# Altium PCB SGK_DVR_01.PcbDoc (part 5 of 7)
Units mil, origin at the board's own origin, x right, y up, seen from the top; angles counter-clockwise.
Board outline 3070.87 x 2598.47 mil, 6 copper layers (Top, L2 GND, l3 POWER, L4 SIG, L5 GND, Bottom), stack 58.1 mil thick; 475 components, 339 nets, 1964 pads, 1036 vias.
Unrouted connection lines stored in the file: 522.
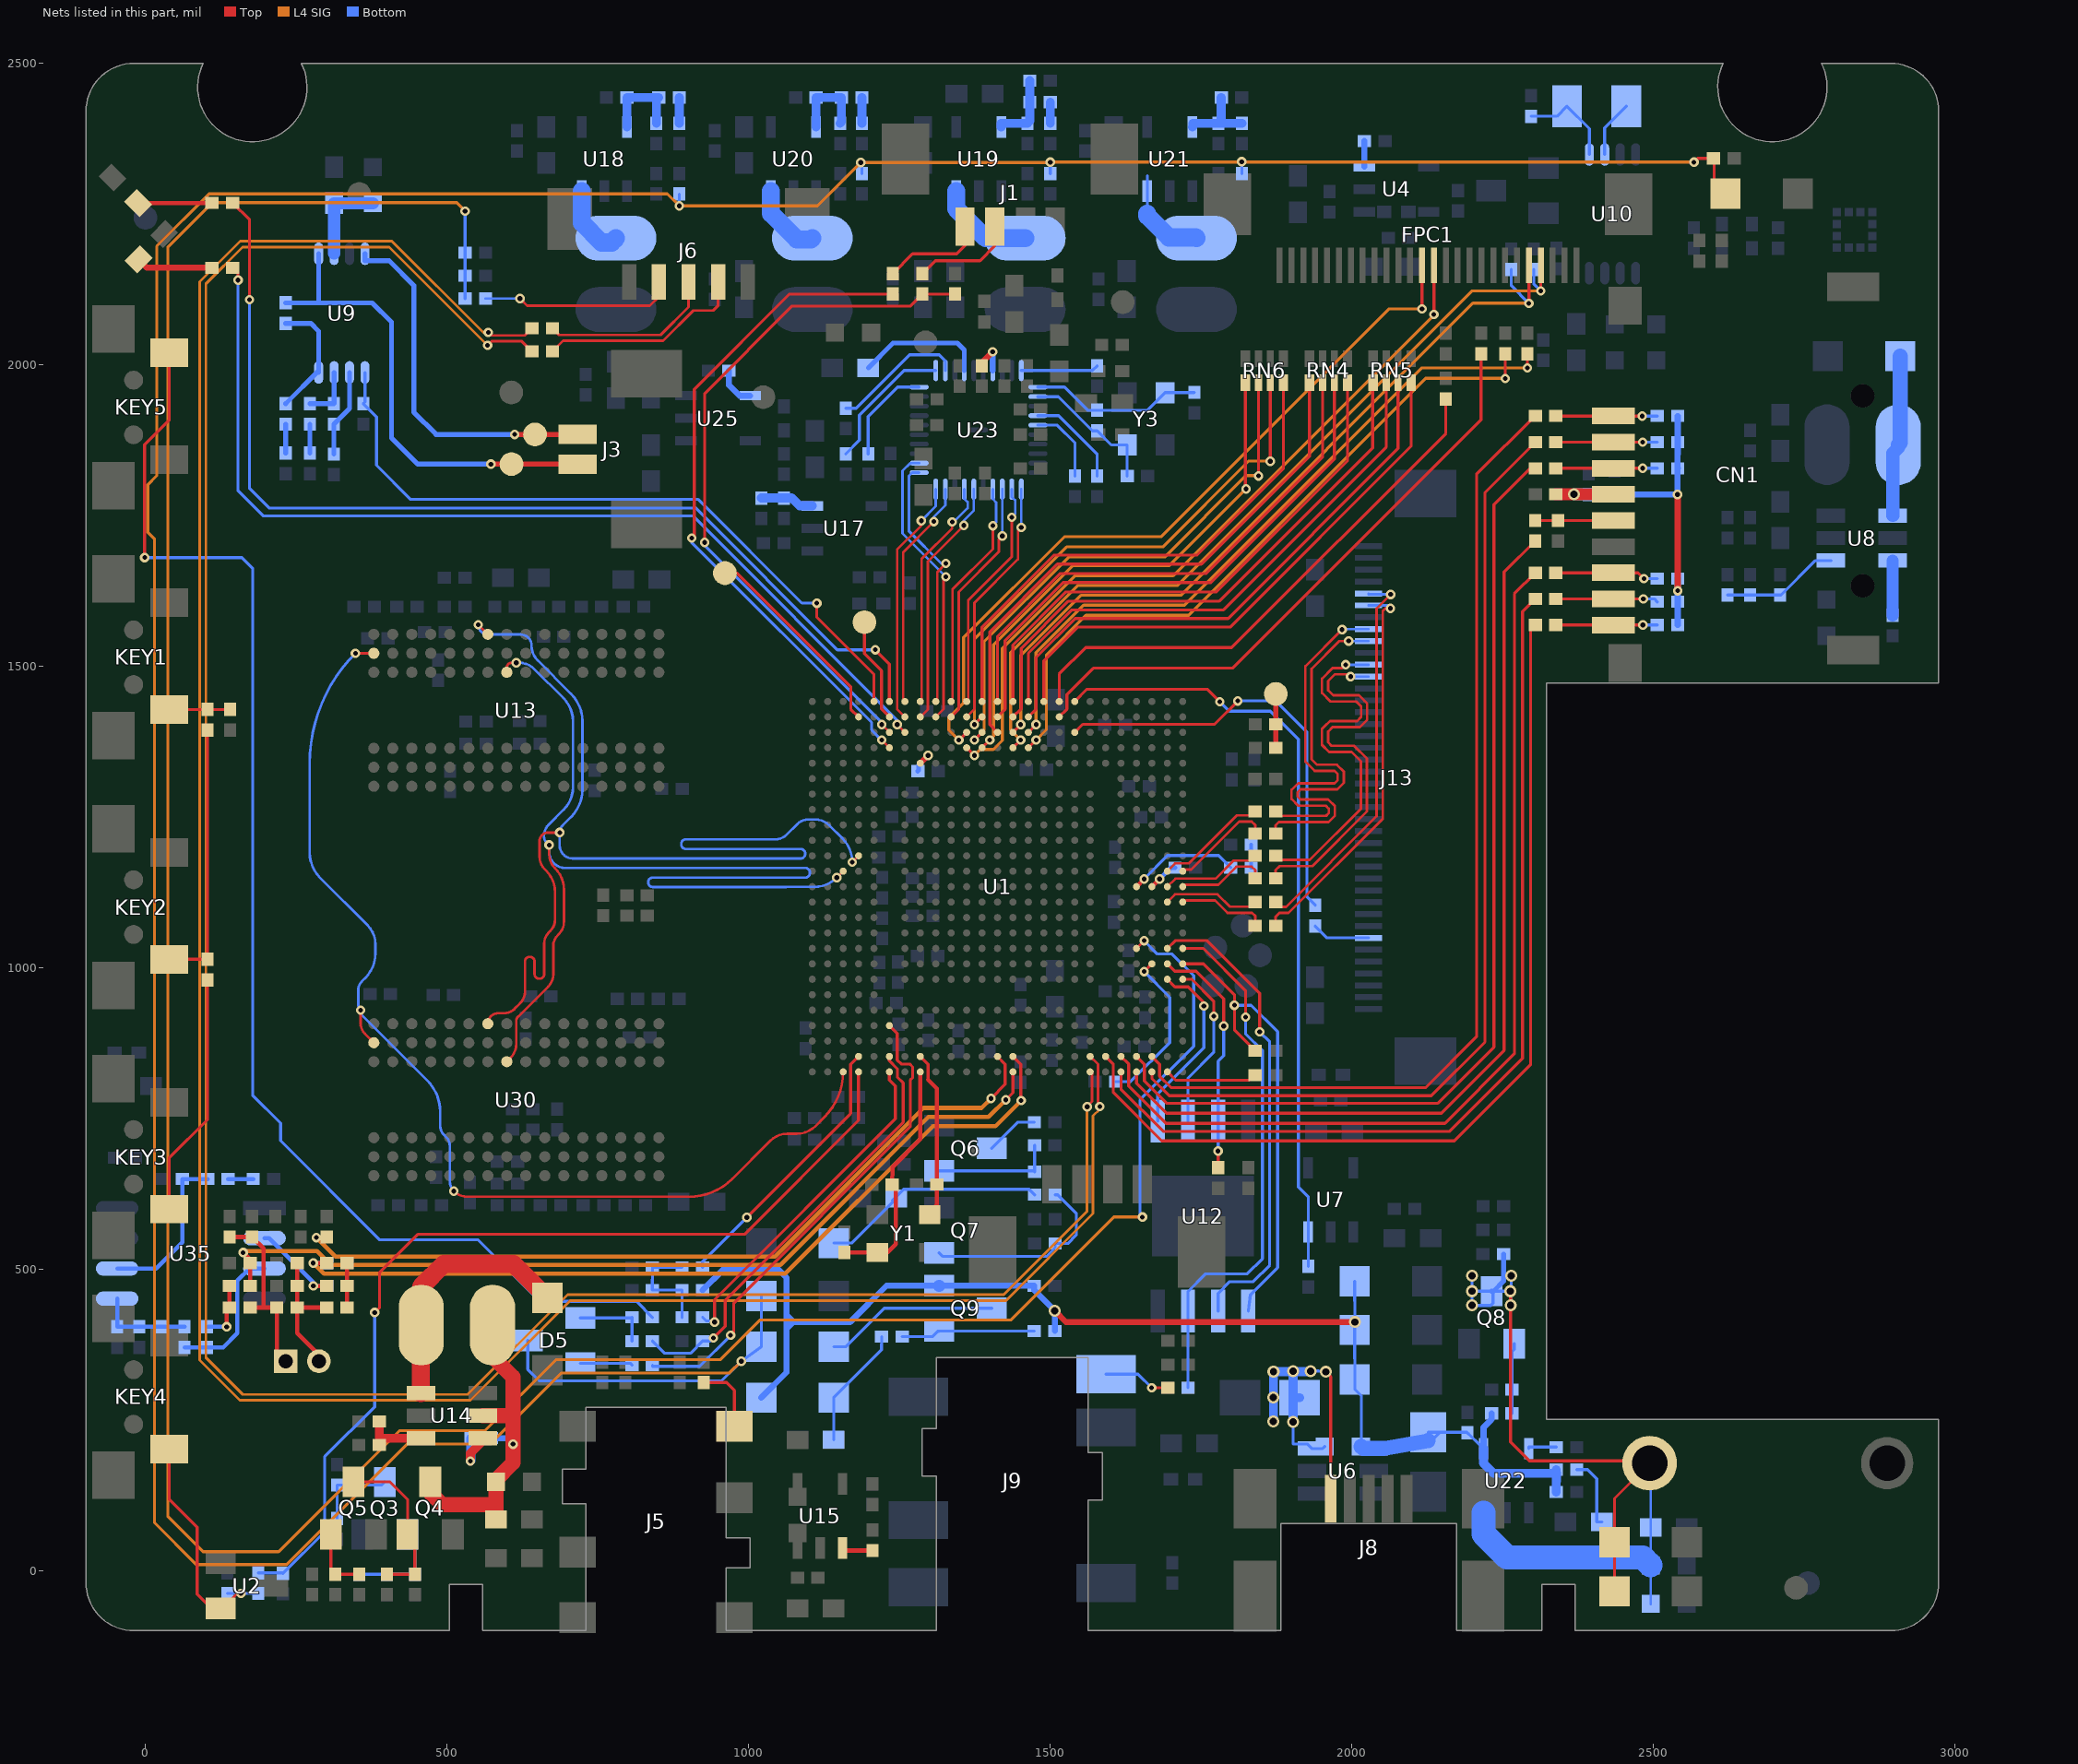
[diagram p7: the nets of this part, all layers, seen from the top]

## Via types
v1: diameter 15.75, hole 7.87, Top to Bottom, 800 vias
v2: diameter 20, hole 12, Top to Bottom, 204 vias
v3: diameter 23.62, hole 11.81, Top to Bottom, 31 vias
v4: diameter 14, hole 8, Top to Bottom, 1 vias

## Nets (pads, with @x,y where several pads share a name; then routed paths per layer and width w, separated by ;. In a path a pad name is that pad's centre, name@x,y a point inside that pad or via, vN(x,y) a via of type N, cw(c..) or ccw(c..) an arc to the next point about the centre after c; other vN are vias at no path point) (continued)
LCD_DEN: R29.1 U1.H1 U7.3 | length 1294.4
  Top w5: U1.H1@1540.38,1442.1 1560.74,1462.45 1760.16,1462.45 v1(1781,1441.61)
  Bottom w5: v1(1781,1441.61) 1796.8,1425.81 1864.73,1425.81 1911.32,1379.22 1911.32,637.24 1927.49,621.06 U7.3@1927.49,562.55 R29.1@1927.49,505.41
LCD_RST: R194.2 U1.H3 | length 721.2
  Top w5: U1.H3@1540.38,1390.92 1553.67,1404.2 1772,1404.2 v1(1810.8,1443)
  Bottom w5: v1(1810.8,1443) 1874.02,1443 1925.2,1391.82 1925.2,1118.76 1938.98,1104.98 R194.2@1938.98,1103.88
LED_KEY: R153.1 U1.Y1 | length 1728.5
  Top w5: R153.1@144.37,2268.53 144.8,2268.53 172.61,2240.73 v1(172.61,2108.37) ; v1(1209.7,1527.84) 1233.29,1504.25 1233.29,1479.05 U1.Y1@1233.3,1442.1
  Bottom w5: v1(172.61,2108.37) 172.61,1795.38 205.16,1762.82 912.01,1762.82 1146.99,1527.84 v1(1209.7,1527.84)
LED_REC: R152.1 U1.W3 | length 1648.9
  Top w4.2: v1(1246.09,1403.71) U1.W3@1258.89,1390.92
  Top w5: R152.1@144.37,2161.04 153.52,2151.88 v1(153.52,2140.7)
  Bottom w5: v1(153.52,2140.7) 153.52,1791.4 195.16,1749.76 907.23,1749.76 1246.09,1410.9 v1(1246.09,1403.71)
MIC+: C104.1 R127.1 R130.1 | length 104.9
  Top w7: v1(134.7,405.28) 134.7,436.88 C104.1@139.46,437.15 R130.1@139.46,472.99
  Bottom w7: R127.1@102.04,405.3 v1(134.7,405.28)
MIC-: C106.1 R123.1 R169.1 | length 73.7
  Top w7: C106.1@334.39,437.15 R123.1@334.39,472.99 R169.1@334.39,510.89
MIC_REF: C130.2 R101.2 R102.1 R170.1 U35.5 | length 158.5
  Bottom w7: U35.5@-46.84,451.99 R102.1@-46.84,405.3 C130.2@-10.08,405.3 R101.2@26.93,405.3 R170.1@64.97,405.3
MICBIAS: R60.1 U1.N24 | length 1341.8
  Top w5: v1(1401.82,783.92) 1425.19,807.29 1425.19,840.76 U1.N24@1412.43,853.51
  Top w7: v1(283.44,553.13) 296.21,553.13 R60.1@300.56,554.09
  L4 SIG w7: v1(283.44,553.13) 314.83,521.74 1043.49,521.74 1289.92,768.17 1386.07,768.17 v1(1401.82,783.92)
MICI_N: C105.1 C106.2 C107.2 MIC1.2 R62.2 | length 226.3
  Top w7: C107.2@251.65,510.89 R62.2@251.65,472.99 C105.1@251.65,437.15 ; MIC1.2@287.56,348.21 287.56,358.9 251.65,394.81 C105.1@251.65,437.15 ; C106.2@300.39,437.15 C105.1@251.65,437.15
MICI_P: C104.2 C105.2 C108.2 MIC1.1 R61.2 | length 301.3
  Top w7: C108.2@139.46,554.09 R61.2@176.74,554.09 195.57,535.26 195.57,437.15 ; C104.2@173.46,437.15 195.57,437.15 ; MIC1.1@232.44,348.21 217.65,363.01 C105.2@217.65,437.15 195.57,437.15
MICINN: C131.2 R169.2 U1.M24 | length 1423
  Top w5: U1.M24@1438.02,853.51 1450.89,840.64 1450.89,781.08 v1(1451.63,780.34)
  Top w7: v1(278.18,510.93) R169.2@300.39,510.89 R169.2@300.39,510.89
  L4 SIG w7: v1(278.18,510.93) 296.14,493.16 1060.47,493.16 1305.31,738 1409.29,738 v1(1451.63,780.34)
  Bottom w7: v1(278.18,510.93) 300.26,510.93 C131.2@300.39,510.8
MICINP: C127.2 R130.2 U1.M25 | length 1499.6
  Top w5: v1(1426.22,781.57) 1438.02,793.37 U1.M25@1438.02,827.92
  Top w7: v1(161.93,528.32) 173.46,516.79 C127.2@173.46,510.89 R130.2@173.46,472.99
  L4 SIG w7: v1(161.93,528.32) 164.63,531.03 284.18,531.03 307.18,508.03 1052.69,508.03 1297.71,753.04 1397.69,753.04 v1(1426.22,781.57)
MIPI_DSI_CLKN: R135.2 U1.B12 | length 186.8
  Top w4.2: U1.B12@1693.93,1160.6 1706.86,1173.54 1729.3,1173.54 1808.84,1253.08 1832.72,1253.08 R135.2@1839.56,1259.92
MIPI_DSI_CLKP: R136.2 U1.A12 | length 170.4
  Top w4.2: U1.A12@1719.52,1160.6 1722.25,1163.33 1733.52,1163.33 1813.06,1242.88 1833.83,1242.88 1839.56,1237.15 R136.2@1839.56,1223.2
MIPI_DSI_DN0: R128.2 U1.B14 | length 162.6
  Top w4.2: U1.B14@1693.93,1109.42 1706.9,1122.4 1777.34,1122.4 1797.85,1101.89 1831.71,1101.89 R128.2@1839.56,1109.54
MIPI_DSI_DN1: R192.2 U1.B13 | length 166.9
  Top w4.2: U1.B13@1693.93,1135.01 1707.31,1148.4 1774.1,1148.4 1804.16,1178.46 1831.66,1178.46 R192.2@1839.56,1186.35
MIPI_DSI_DP0: R134.2 U1.A14 | length 148.3
  Top w4.2: U1.A14@1719.52,1109.42 1722.29,1112.19 1773.11,1112.19 1793.62,1091.68 1834.37,1091.68 1839.56,1086.49 R134.2@1839.56,1070.04
MIPI_DSI_DP1: R193.2 U1.A13 | length 149.9
  Top w4.2: U1.A13@1719.52,1135.01 1722.7,1138.19 1778.32,1138.19 1808.39,1168.25 1833.72,1168.25 1839.56,1162.41 R193.2@1839.56,1148.77
N17505188: C169.2 R149.2 R150.1 U21.5 | length 130.1
  Bottom w15: U21.5@1735.49,2394.59 1736.64,2395.74 1736.64,2400.74 C169.2@1778.81,2400.74 C169.2@1783.4,2400.74 ; R150.1@1783.4,2443.42 C169.2@1783.4,2400.74 ; R149.2@1817.4,2400.74 C169.2@1783.4,2400.74
N17505196: L12.1 U21.3 | length 163.2
  Bottom w4.4: 1660.68,2250.74 U21.3@1660.68,2288.29 1660.68,2313.62
  Bottom w30: 1660.68,2250.74 1660.68,2247.36 1696.65,2211.4 1741.16,2211.4 L12.1@1742.26,2210.29
N17861583: C161.2 R141.2 R145.1 U19.5 | length 121.7
  Bottom w15: U19.5@1418.75,2394.59 1418.76,2400.74 C161.2@1461.88,2400.74 1465.96,2404.82 R141.2@1465.96,2435.84 R145.1@1465.96,2471.5
N17861591: L10.1 U19.3 | length 163.7
  Bottom w30: U19.3@1343.95,2288.29 1343.95,2259.23 1392.89,2210.29 L10.1@1458.29,2210.29
N17862747: C155.2 R132.2 R133.1 U18.5 | length 144.4
  Bottom w15: U18.5@798.11,2394.59 R133.1@798.11,2443.42 R132.2@846.97,2443.42 ; C155.2@846.97,2400.74 R132.2@846.97,2443.42 ; R132.2@850.99,2443.42 R132.2@846.97,2443.42
N17862755: L9.1 U18.3 | length 125.7
  Bottom w30: U18.3@723.3,2288.29 723.3,2235.71 755.92,2203.09 772.06,2203.09 772.73,2203.09 L9.1@779.93,2210.29
N17948495: D1.1 L1.1 U8.1 | length 269.5
  Bottom w22: U8.1@2896.43,1750.42 2896.43,1853.65 2905.56,1862.78 L1.1@2905.56,1867.83
  Bottom w25: L1.1@2905.56,1867.83 2908.82,1871.09 D1.1@2908.82,2014.77
N17948682: C101.1 R49.2 R52.1 U8.4 | length 195.1
  Bottom w5: R49.2@2622.64,1618.47 C101.1@2659.8,1618.47 R52.1@2709.83,1618.47 2711.22,1618.47 2768.37,1675.62 U8.4@2794.07,1675.62
N18041443: R64.2 R66.2 U9.3 | length 91.9
  Bottom w8: R66.2@272.44,1935.83 R64.2@312.5,1935.83 312.71,1936.04 U9.3@312.71,1987.59
N18041447: C111.2 R64.1 U9.2 | length 146.1
  Bottom w8: C111.2@312.5,1852.21 R64.1@312.5,1901.83 338.3,1927.63 U9.2@338.3,1987.59
N18041449: R65.1 R67.2 U9.4 | length 205.6
  Bottom w8: R67.2@232.48,1935.83 U9.4@287.12,1990.48 ; R65.1@232.48,2069.02 273.91,2069.02 287.12,2055.81 U9.4@287.12,1990.48 ; U9.4@287.12,1987.59 U9.4@287.12,1990.48
N18041605: C112.2 R66.1 | length 47.9
  Bottom w8: C112.2@272.44,1853.96 R66.1@272.44,1901.83
N18041626: C113.2 R67.1 | length 47.9
  Bottom w8: C113.2@232.48,1853.96 R67.1@232.48,1901.83
N18172778: R154.2 U22.5 | length 48.1
  Bottom w5: U22.5@2292.95,203.44 2292.95,205.81 R154.2@2338.64,205.81
N18172930: Q8.1 R155.1 R156.2 | length 117.3
  Bottom w5: R155.1@2265.22,261.7 R156.2@2265.22,301.32 2265.22,364.3 2265.48,364.3 2268.93,367.75 Q8.1@2268.93,377.28
N18178239: LED2.1 R151.1 | length 119.3
  Bottom w5: R151.1@2372.64,168.51 2390.37,168.51 2405.75,153.13 2405.75,81.69 LED2.1@2414.17,81.69
N18195749: R50.1 U8.3 | length 90.7
  Bottom w20: R50.1@2896.43,1584.92 U8.3@2896.43,1675.62
N18287369: LED1.1 R152.2 | length 127.4
  Top w10: LED1.1@-11.33,2174.93 2.54,2161.06 R152.2@110.37,2161.04
N18652156: R2.1 U1.C13 | length 51.3
  Top w7: U1.C13@1668.34,1135.01 v1(1681.13,1147.8)
  Bottom w8: v1(1681.13,1147.8) 1699.61,1166.29 R2.1@1706.65,1166.29
N18652220: R1.1 U1.V5 | length 51
  Top w10: U1.V5@1284.48,1339.73 v1(1297.27,1352.53)
  Bottom w8: R1.1@1280.26,1326.63 1281.7,1328.06 1281.7,1336.96 v1(1297.27,1352.53)
N19793357: J1.3 R3.2 | length 170.8
  Top w5: R3.2@1287.93,2151.52 1309.4,2172.99 1383.4,2172.99 1407.72,2197.31 J1.3@1407.72,2229.34
N19820022: R131.2 R185.2 U17.3 | length 90.1
  Bottom w15: R185.2@1020.87,1779.44 R131.2@1058.47,1779.44 1067.47,1779.44 1071.15,1779.44 1084.24,1766.34 U17.3@1105.53,1766.34
N19825127: Q3.3 R86.2 R181.1 | length 136.5
  Bottom w4.4: Q3.3@381.62,142.89 391.62,142.89 Q3.3@396.66,147.93
  Bottom w5: R86.2@317.88,87.31 R181.1@317.88,142.89 Q3.3@381.62,142.89
N19825129: C124.2 Q3.1 R90.2 R93.1 | length 163.4
  Bottom w5: R93.1@354.33,-4.94 C124.2@400.53,-4.94 R90.2@446.68,-4.94 446.68,48.41 Q3.1@434.16,60.93
N19825144: J5.5 R87.2 | length 115.7
  Top w5: R87.2@925.6,312.78 963.25,312.78 976.38,299.65 J5.5@976.38,240.16
N19840754: C136.2 L5.1 Q4.3 R105.2 R108.2 U14.5 | length 573.8
  Top w25: Q4.3@472.11,148.15 472.11,129.93 491.89,110.15 580.87,110.15 ; U14.5@559.1,257.9 609.36,257.9 ; L5.1@575.33,408.23 575.33,355.87 609.36,321.85 609.36,257.9 ; C136.2@580.87,85.64 580.87,110.15 ; 580.87,110.15 R105.2@580.87,148.15 580.87,151.31 609.36,179.79 v1(609.36,210.66) 609.36,257.9
  Bottom w10: R108.2@573.56,220.56 599.46,220.56 v1(609.36,210.66)
N19840771: D2.1 L5.2 U14.1 | length 425.1
  Top w30: U14.1@456.74,295.3 456.74,407.74 L5.2@457.22,408.23 457.22,471.96 494.93,509.66 609.85,509.66 D2.1@666.43,453.08
N19840787: R108.1 U14.4 | length 90.9
  Top w15: v1(538.75,182.52) 538.75,195.83 563.42,220.5 U14.4@559.1,220.5
  Bottom w15: v1(538.75,182.52) 539.56,183.33 R108.1@539.56,220.56
N19840816: R110.1 R112.2 U14.3 | length 119.3
  Top w15: R112.2@387.72,248.48 R110.1@387.72,209.25 387.94,220.5 U14.3@456.74,220.5
N19986332: D5.1 R139.1 R140.2 | length 125.2
  Bottom w5: D5.1@721,419.84 805.4,419.84 R139.1@806.46,420.89 R140.2@806.46,381.58
N19986942: C166.2 R147.2 R148.1 U20.5 | length 134.5
  Bottom w15: U20.5@1111.69,2394.59 R148.1@1111.69,2443.42 R147.2@1153.72,2443.42 1153.72,2403.04 C166.2@1151.42,2400.74
N19986950: L11.1 U20.3 | length 124.4
  Bottom w30: U20.3@1036.89,2288.29 1036.89,2251.21 1079.9,2208.2 1103.21,2208.2 1103.41,2208.2 L11.1@1105.5,2210.29
N20047170: U10.2 Y4.1 | length 94.8
  Bottom w5: U10.2@2419.01,2348.99 2419.01,2393.1 Y4.1@2454.81,2428.91
N20047172: C117.1 U10.1 Y4.2 | length 161.4
  Bottom w5: C117.1@2297.14,2412.32 2339.8,2412.32 Y4.2@2356.39,2428.91 2393.42,2391.88 U10.1@2393.42,2348.99
N20179778: J6.4 R109.1 | length 323.1
  Top w4.4: v1(620.72,2110.17) 632.74,2098.15 836.23,2098.15 851.01,2112.93 J6.4@851.01,2137.8
  Bottom w4.4: R109.1@563.91,2110.17 v1(620.72,2110.17)
N20423645: C1.2 R178.1 | length 37.7
  Bottom w6: R178.1@1832.77,1166.7 C1.2@1832.77,1204.43
N20470404: R147.1 R186.2 | length 42.7
  Bottom w15: R186.2@1187.72,2400.74 R147.1@1187.72,2443.42
N20470779: R141.1 R187.2 | length 35.1
  Bottom w15: R187.2@1499.96,2400.74 R141.1@1499.96,2435.84
N20474726: R98.1 U15.3 | length 58.5
  Top w8: U15.3@1155.68,38.42 U15.3@1156.61,39.47 ; R98.1@1204.96,34.37 1156.61,34.37 1156.61,38.42 U15.3@1156.61,39.47 ; U15.3@1156.61,39.47 1157.8,40.82 1156.61,39.63 U15.3@1156.61,39.47
N20475516: C135.1 Q4.1 Q5.3 R111.1 | length 277
  Top w5: Q5.3@344.84,148.15 405.62,148.15 434.61,119.16 Q4.1@434.61,61.15 446.68,49.09 C135.1@446.68,-4.94 R111.1@400.53,-4.94
N20475552: Q5.1 R113.1 R114.1 | length 111.1
  Top w5: Q5.1@307.34,61.15 307.34,-0.4 312.75,-5.81 313.61,-4.94 R113.1@314.69,-4.94 R114.1@354.33,-4.94
N20482709: R4.1 U1.C18 | length 269.7
  Top w5: v1(1655.54,994.26) U1.C18@1668.34,1007.06
  Bottom w5: R4.1@1608.16,811.81 1633.22,811.81 1697.78,876.37 1697.78,951.62 v1(1655.54,994.26)
N20498520: R95.1 R96.1 TP16.1 | length 89.6
  Top w8: R95.1@1873.75,1364.96 R96.1@1873.75,1404.33 TP16.1@1873.75,1454.56
N20618713: R132.1 R188.2 | length 42.7
  Bottom w15: R188.2@884.99,2400.74 R132.1@884.99,2443.42
N20762364: D5.2 R163.1 | length 86.7
  Bottom w5: D5.2@721,344.84 803.35,344.84 R163.1@806.46,341.73
N20784027: R123.2 R124.1 U35.2 | length 161.2
  Top w7: v1(278.38,472.99) R123.2@300.39,472.99
  Bottom w7: U35.2@197.26,551.99 205.16,551.99 278.38,478.77 v1(278.38,472.99) R124.1@300.39,472.99
N20785011: R125.2 R126.1 U35.6 | length 272.9
  Bottom w7: U35.6@-46.84,501.99 17.86,501.99 61.04,545.17 R126.1@61.04,650.26 R125.2@103.11,650.26
N20785021: C128.2 R125.1 | length 41.6
  Bottom w7: R125.1@137.11,650.26 C128.2@178.67,650.26
N20785728: R127.2 R170.2 U35.3 | length 237.5
  Bottom w7: R170.2@64.97,371.3 R127.2@102.04,371.3 128.94,371.29 152.29,394.64 152.29,481.86 172.42,501.99 U35.3@197.26,501.99
N20838752: LED3.1 R153.2 | length 122.5
  Top w7: LED3.1@-12.11,2268.53 R153.2@110.37,2268.53
N20840441: KEY1.1 R167.1 R171.2 | length 100.8
  Top w4.4: R171.2@102.9,1428.74 R167.1@140.16,1428.74
  Top w5: KEY1.1@39.37,1428.74 R171.2@102.9,1428.74
N20841613: KEY3.1 R172.1 | length 406.5
  Top w5: KEY3.1@39.37,600.39 39.37,685.29 102.9,748.82 R172.1@102.9,980.57
N20842002: KEY2.1 R171.1 R172.2 | length 443.7
  Top w5: KEY2.1@39.37,1014.57 R172.2@102.9,1014.57 R171.1@102.9,1394.74
N20843675: Q6.1 R100.2 R173.1 | length 203.7
  Bottom w5: Q6.1@1315.74,663.81 1473.61,663.81 R100.2@1473.96,663.46 ; R173.1@1473.86,706.32 1473.96,706.22 R100.2@1473.96,663.46 ; R100.2@1473.96,663.46 R100.2@1473.97,662.23 R100.2@1473.97,663.45
N20845140: C201.2 D12.1 R175.1 | length 388.1
  Bottom w5: D12.1@1140.88,544.01 1170.58,544.01 C201.2@1244.59,618.01 1238.42,614.79 1244.59,620.95 1256.73,633.09 1465.07,633.09 R175.1@1473.97,624.2
N20845142: Q7.1 R175.2 R176.2 | length 332.6
  Bottom w5: Q7.1@1315.74,527.76 1321.33,522.17 1494.21,522.17 1507.97,535.93 R176.2@1507.97,543.37 1529.19,543.37 1543.08,557.26 1543.08,593.42 1512.31,624.2 R175.2@1507.97,624.2
N20845996: Q9.1 R189.2 R190.2 | length 223
  Bottom w5: R189.2@1254.36,388.85 1304.53,388.85 1313.62,397.94 1315.35,397.94 Q9.1@1315.74,398.33 R190.2@1473.42,398.33
N20845998: C202.2 D13.1 R189.1 | length 203.6
  Bottom w5: C202.2@1140.89,218.16 D13.1@1140.89,287.91 1220.28,367.29 R189.1@1220.36,388.85
N20848785: J13.5 R128.1 | length 648.4
  Top w4.2: R128.1@1873.56,1109.54 1881.46,1101.64 1890.73,1101.64 2040.88,1251.78 2040.88,1596.26 v1(2064.21,1619.59)
  Bottom w4.2: J13.5@2027.56,1621.06 2027.56,1619.59 v1(2064.21,1619.59)
N20848788: J13.6 R134.1 | length 659.4
  Top w4.2: R134.1@1873.56,1070.04 1873.56,1085.07 1879.92,1091.43 1894.95,1091.43 2051.09,1247.57 2051.09,1592.03 2055.39,1596.34 v1(2063.66,1596.34)
  Bottom w4.2: J13.6@2027.56,1601.37 2063.18,1601.37 2063.66,1596.89 v1(2063.66,1596.34)
N20848830: J13.8 R135.1 | length 627.6
  Top w4.2: R135.1@1873.56,1259.92 1881.04,1252.44 1957.05,1252.44 1961.49,1256.89 1961.49,1264.21 1956.4,1269.3 1910.62,1269.3 1899.87,1280.05 1899.87,1295.65 1910.7,1306.47 1971.29,1306.47 1976.33,1311.51 1976.33,1321.56 1970.99,1326.9 1938.04,1326.9 1922.8,1342.15 1922.8,1500.34 v1(1983.72,1561.26)
  Bottom w4.2: v1(1983.72,1561.26) 1984.46,1562 J13.8@2027.56,1562
N20848832: J13.9 R136.1 | length 636.4
  Top w4.2: R136.1@1873.56,1223.2 1873.56,1236.76 1879.03,1242.23 1961.27,1242.23 1971.69,1252.65 1971.69,1268.44 1960.63,1279.5 1914.85,1279.5 1910.08,1284.27 1910.08,1291.42 1914.93,1296.27 1975.52,1296.27 1986.54,1307.28 1986.54,1325.79 1975.22,1337.11 1947.78,1337.11 1942.26,1337.11 1933.01,1346.37 1933.01,1496.12 1979.23,1542.34 v1(1994.46,1542.34)
  Bottom w4.2: v1(1994.46,1542.34) J13.9@2027.56,1542.32
N20848876: J13.11 R192.1 | length 635.7
  Top w4.2: R192.1@1873.56,1186.35 1880.56,1179.36 1909.12,1179.36 1930.1,1179.36 2014.66,1263.91 2014.66,1343.16 1999.51,1358.31 1961.98,1358.31 1950.19,1370.1 1950.19,1396.39 1955.59,1401.8 1963.5,1409.71 2008.74,1409.71 2015.04,1416.01 2015.04,1434.41 2007.39,1442.06 1964.62,1442.06 1950.39,1456.29 1950.39,1480.03 1967.8,1497.44 1984.02,1497.44 v1(1989.56,1502.98)
  Bottom w4.2: v1(1989.56,1502.98) J13.11@2027.56,1502.95
N20848878: J13.12 R193.1 | length 648.6
  Top w4.2: R193.1@1873.56,1148.77 1873.56,1162.45 1880.26,1169.15 1934.32,1169.15 2024.87,1259.69 2024.87,1347.39 2003.74,1368.52 1966.21,1368.52 1960.39,1374.33 1960.39,1392.17 1967.73,1399.5 2012.97,1399.5 2022.27,1408.81 2025.25,1411.78 2025.25,1438.62 2020.68,1443.19 2011.6,1452.27 1968.84,1452.27 1960.6,1460.51 1960.6,1475.81 1972.02,1487.23 1993.85,1487.23 v1(1997.81,1483.26)
  Bottom w4.2: v1(1997.81,1483.26) J13.12@2027.56,1483.26
N20848963: J13.34 R194.1 | length 96.7
  Bottom w5: R194.1@1938.98,1069.88 1958.66,1050.19 J13.34@2027.56,1050.19
N20859441: J9.6 R198.2 | length 111.6
  Top w5: v1(1667.96,304.15) R198.2@1694.71,304.02
  Bottom w5: J9.6@1592.52,326.77 1645.33,326.77 v1(1667.96,304.15)
N20878479: C52.2 U23.4 | length 215.1
  Bottom w8: C52.2@1198.16,1995.06 1239.33,2036.22 1346.08,2036.22 1357.38,2024.92 U23.4@1357.38,1990.8
N20878490: R195.1 U23.10 | length 129
  Bottom w5: U23.10@1451.87,1990.8 1569.7,1990.8 R195.1@1577.63,1998.72
N20879975: C60.1 U25.4 | length 66.5
  Bottom w10: C60.1@967.16,1990.65 967.16,1966.7 984.75,1949.1 U25.4@1002.45,1949.1
N20880671: R28.2 U4.3 | length 42.8
  Bottom w10: U4.3@2020.65,2328.71 R28.2@2020.65,2371.5
N20888253: TP6.1 U1.AB2 | length 342.1
  Top w5: TP6.1@960.54,1654.91 981.08,1654.83 1169.26,1466.65 1169.26,1429.36 U1.AB2@1182.11,1416.51
N20888273: TP9.1 U1.Y2 | length 174.1
  Top w5: TP9.1@1191.88,1573.51 1191.93,1521.33 1220.35,1492.91 1220.35,1429.45 U1.Y2@1233.3,1416.51
N20888617: J1.4 R15.2 | length 170.6
  Top w5: R15.2@1239,2151.52 1271.69,2184.21 1345.04,2184.21 1358.83,2198 1358.83,2229.01 J1.4@1358.51,2229.34
N208436921: Q6.3 R116.2 | length 88.6
  Bottom w5: Q6.3@1402.74,701.31 1445.76,744.33 R116.2@1473.52,744.33
ODT: U1.AB11 U13.K1 U30.K1 | length 2172.4
  Top w4.2: v1(551.79,1569.18) U13.K1@567.54,1553.44 ; U30.K1@567.54,907.77 cw(c584.98,907.77) 584.98,925.21 594.63,925.21 ccw(c594.63,949.32) 611.68,932.27 620.96,941.55 ccw(c601.32,961.19) 629.1,961.19 629.1,1011.14 cw(c636.45,1011.14) 636.45,1018.49 637.68,1018.49 cw(c637.68,1011.14) 645.03,1011.14 645.03,989.77 ccw(c652.38,989.77) 652.38,982.42 653.55,982.42 ccw(c653.55,989.77) 660.9,989.77 660.9,1040.19 cw(c687.62,1040.19) 668.72,1059.08 671.11,1061.47 ccw(c651.95,1080.62) 679.04,1080.62 679.04,1125.93 ccw(c628.52,1125.93) 664.25,1161.66 661.85,1164.06 cw(c682.67,1184.88) 653.22,1184.88 653.22,1210.37 cw(c667.58,1210.37) 667.58,1224.72 v1(686.72,1224.72) ; v1(1171.62,1175.7) U1.AB11@1182.11,1186.19
  Bottom w4.2: v1(551.79,1569.18) ccw(c567.89,1569.18) 567.89,1553.08 621.83,1553.08 cw(c621.83,1534.84) 640.08,1534.84 640.08,1534.31 ccw(c674.08,1534.31) 650.04,1510.27 705.52,1454.78 cw(c659.88,1409.14) 724.43,1409.14 724.43,1296.24 cw(c659.93,1296.24) 705.54,1250.64 691.73,1236.84 ccw(c703.84,1224.72) v1(686.72,1224.72) 686.72,1203.21 ; 686.72,1203.21 ccw(c708.12,1203.21) 708.12,1181.8 ; 686.72,1203.21 ccw(c708.12,1203.21) 708.12,1181.8 ; 708.12,1181.8 758.03,1181.8 ; 758.03,1181.8 ccw(c759.3,1270.75) 759.3,1181.79 ; 758.03,1181.8 ccw(c759.3,1270.75) 759.3,1181.79 ; 759.3,1181.79 1086.2,1181.79 ; 888.22,1204.91 ccw(c895.57,1204.91) 895.57,1197.56 ; 888.22,1204.91 ccw(c895.57,1204.91) 895.57,1197.56 ; 888.22,1204.91 888.22,1206.08 ; 888.22,1206.08 cw(c895.57,1206.08) 895.57,1213.43 ; 888.22,1206.08 cw(c895.57,1206.08) 895.57,1213.43 ; 895.57,1197.56 1086.2,1197.56 ; 895.57,1213.43 1044.12,1213.43 ; 1044.12,1213.43 ccw(c1044.12,1240.45) 1063.22,1221.34 ; 1044.12,1213.43 ccw(c1044.12,1240.45) 1063.22,1221.34 ; 1063.22,1221.34 1081,1239.12 ; 1081,1239.12 cw(c1098.1,1222.02) 1098.1,1246.2 ; 1081,1239.12 cw(c1098.1,1222.02) 1098.1,1246.2 ; 1086.2,1181.79 ccw(c1086.2,1189.14) 1093.55,1189.14 ; 1086.2,1181.79 ccw(c1086.2,1189.14) 1093.55,1189.14 ; 1086.2,1197.56 cw(c1086.2,1190.21) 1093.55,1190.21 ; 1086.2,1197.56 cw(c1086.2,1190.21) 1093.55,1190.21 ; 1093.55,1189.14 1093.55,1190.21 ; 1098.1,1246.2 1110.7,1246.2 ; 1110.7,1246.2 cw(c1110.7,1213.81) 1133.6,1236.72 ; 1110.7,1246.2 cw(c1110.7,1213.81) 1133.6,1236.72 ; 1133.6,1236.72 1155.37,1214.94 ; 1155.37,1214.94 cw(c1116.13,1175.7) v1(1171.62,1175.7) ccw(c1116.13,1175.7) 1155.37,1214.94
OV33_SD: C118.2 C119.2 CN1.4 FB9.2 R73.1 R74.1 R75.1 R76.1 R77.1 R79.1 | length 679.5
  Top w10: v1(2539.7,1785.32) 2540,1785.02 2540,1757.83 v1(2540,1625.7)
  Top w20: C118.2@2337.87,1785.43 v2@2370.62,1785.43 ; v2(2367.89,1785.43) v2@2370.62,1785.43 ; CN1.4@2433.07,1785.43 v2@2370.62,1785.43
  Bottom w10: C119.2@2392.71,1785.43 FB9.2@2435.52,1785.43 2539.58,1785.43 v1(2539.7,1785.32) R76.1@2539.7,1828.74 ; R73.1@2540,1568.9 R74.1@2540,1607.29 v1(2540,1625.7) R75.1@2540,1645.77 ; R76.1@2540,1828.74 R76.1@2539.7,1828.74 ; R77.1@2540,1915.31 R79.1@2540,1872.05 R76.1@2539.7,1828.74
  Bottom w20: v2(2367.89,1785.43) 2379.87,1785.43 C119.2@2392.71,1785.43 FB9.2@2435.52,1785.43
PA_SHDN: R63.1 U1.AA1 U9.1 | length 1190.7
  Top w5: v1(1112.91,1604.99) 1112.91,1581.51 1207.7,1486.73 U1.AA1@1207.71,1442.1
  Bottom w5: U9.1@363.89,1987.59 363.89,1938.53 R63.1@361.2,1935.83 383.08,1913.95 383.08,1833.78 439.79,1777.08 916.33,1777.08 1088.15,1605.26 1112.64,1605.26 v1(1112.91,1604.99)
PA_VDD: C114.2 FB8.1 U9.6 | length 148.4
  Bottom w20: U9.6@312.71,2184.44 312.71,2268.01 C114.2@312.59,2268.14 FB8.1@377.19,2268.14
PADA_VCOM: R178.2 U1.D13 | length 185.6
  Top w7: U1.D13@1642.74,1135.01 v1(1655.54,1147.8)
  Bottom w5: v1(1655.54,1147.8) 1694.24,1186.51 1778.97,1186.51 R178.2@1798.77,1166.7
PMU_RSTN: C44.2 R13.2 U1.AB25 | length 1585.5
  Top w5: v1(380.03,428.98) 388.22,437.17 388.22,495.44 451.37,558.59 993.2,558.59 1182.11,747.5 U1.AB25@1182.11,827.92
  Bottom w5: R13.2@187.16,-2.81 227.09,-2.81 C44.2@227.89,-3.61 297.13,65.63 297.13,190.35 380.03,272.54 v1(380.03,428.98)
PMU_XIN: C35.1 R5.1 U1.V25 Y1.1 | length 398.4
  Top w7: R5.1@1158.53,528.42 Y1.1@1213.18,528.42 1230.02,528.42 1244.01,542.41 1244.01,634.82 C35.1@1237.98,640.84 1238.35,670.11 1284.48,716.24 U1.V25@1284.48,827.92
PMU_XOUT: C36.1 U1.V24 Y1.3 | length 278.7
  Top w5: U1.V24@1284.66,853.33 1297.48,840.5 1297.48,814.88
  Top w7: U1.V24@1284.48,853.51 U1.V24@1284.66,853.33 ; 1297.48,814.88 1312.13,800.23 C36.1@1312.13,641.49 1312.13,607.32 1299.79,594.98 Y1.3@1299.79,591.41
POWER_HOLD: R163.2 U1.Y22 | length 815.5
  Top w5: v1(969.96,391.16) 975.24,396.44 975.24,444.55 1267.86,737.17 1267.86,814.08 1271.77,818 1271.77,836.19 1267.11,840.85 1252.92,840.85 1246.17,847.6 1246.17,891.82 U1.Y22@1233.3,904.69
  Bottom w5: R163.2@840.46,341.73 840.46,339.78 918.58,339.78 v1(969.96,391.16)
PR2000_RSTN: R32.1 U23.2 | length 222.1
  Bottom w5: R32.1@1160.91,1928.31 1177.92,1928.31 1266.67,2017.06 1315.8,2017.06 1325.88,2006.98 U23.2@1325.88,1990.8
PR2000_SCL: R33.1 U23.1 | length 230.6
  Bottom w5: R33.1@1160.91,1852.72 1183.55,1875.36 1183.55,1916.58 1257.78,1990.8 U23.1@1310.14,1990.8
PR2000_SDA: R34.1 U23.40 | length 166.5
  Bottom w5: R34.1@1198.12,1852.72 1198.12,1914.65 1246.71,1963.24 U23.40@1282.58,1963.24
PR2000_VREF: C66.2 U23.7 | length 64.6
  Top w10: C66.2@1386.16,1998.62 1386.16,2003.72 v1(1404.44,2022)
  Bottom w10: v1(1404.44,2022) 1402.87,2020.42 1404.62,2020.42 U23.7@1404.62,1990.8
PR2000_XI: C51.1 R14.1 U23.11 Y3.1 | length 287.4
  Bottom w5: U23.11@1479.43,1963.24 1523.42,1963.24 1561.75,1924.9 R14.1@1577.63,1924.9 1661.25,1924.9 Y3.1@1690.38,1954.03 1738.17,1954.03 C51.1@1738.66,1954.52
PR2000_XO: C49.1 R14.2 U23.12 Y3.3 | length 232.7
  Bottom w5: U23.12@1479.43,1947.49 1513.29,1947.49 1569.88,1890.9 R14.2@1577.63,1890.9 1601.11,1867.42 Y3.3@1627.39,1867.42 C49.1@1627.39,1815.81
PWR_KEY: R140.1 R143.1 U1.Y24 | length 726.5
  Top w5: v1(941.4,386.65) 960.99,406.24 960.99,449.27 1256.09,744.37 1256.09,809.51 1246.55,819.06 1246.55,833.06 1233.29,846.32 U1.Y24@1233.3,853.51
  Bottom w5: R140.1@840.46,381.58 860.72,361.32 903.34,361.32 R143.1@923.6,381.58 936.33,381.58 v1(941.4,386.65)
PWR_ON: KEY5.2 R139.2 | length 2252.8
  Top w5: v1(-1.3,1680.73) -1.3,1867.68 39.37,1908.35 KEY5.2@39.37,2020.08
  Bottom w5: v1(-1.3,1680.73) -3.37,1680.73 11.97,1680.67 159.98,1680.67 177.69,1662.97 177.69,789.23 224,742.92 224,713.86 388.47,549.39 551.62,549.39 653.59,447.42 813.93,447.42 R139.2@840.46,420.89
RAS#: U1.AC12 U13.J3 U30.J3 | length 2002.7
  Top w4.2: U30.J3@599.03,844.78 604.72,850.46 ccw(c580.75,874.44) 614.65,874.44 614.65,911.85 cw(c625.52,911.85) 617.84,919.53 667.8,969.49 ccw(c647.84,989.45) 676.06,989.45 676.06,1037.14 cw(c700.05,1037.14) 683.09,1054.1 685.21,1056.22 ccw(c664.09,1077.34) 693.96,1077.34 693.96,1129.15 ccw(c641.89,1129.15) 678.71,1165.97 cw(c701.75,1189.01) 669.16,1189.01 v1(669.16,1204.11) ; U13.J3@599.03,1490.44 599.03,1498.01 cw(c607.22,1498.01) 607.22,1506.19 v1(614.78,1506.19) ; v1(1146.03,1150.11) U1.AC12@1156.52,1160.6
  Bottom w4.2: v1(614.78,1506.19) 614.78,1506.11 620.03,1506.11 cw(c620.03,1471.76) 644.32,1496.05 692.85,1447.52 cw(c654.61,1409.28) 708.69,1409.28 708.69,1300.01 cw(c656.25,1300.01) 693.33,1262.92 668.22,1237.81 ccw(c686.33,1219.71) 660.72,1219.71 660.72,1217.54 ccw(c672.77,1217.54) 664.25,1209.02 v1(669.16,1204.11) 669.16,1192.74 ; 669.16,1192.74 ccw(c695.8,1192.74) 695.8,1166.1 ; 669.16,1192.74 ccw(c695.8,1192.74) 695.8,1166.1 ; 695.8,1166.1 1093.92,1166.1 ; 833.47,1141.83 ccw(c840.82,1141.83) 840.82,1134.48 ; 833.47,1141.83 ccw(c840.82,1141.83) 840.82,1134.48 ; 833.47,1141.83 833.47,1142.71 ; 833.47,1142.71 cw(c840.82,1142.71) 840.82,1150.06 ; 833.47,1142.71 cw(c840.82,1142.71) 840.82,1150.06 ; 840.82,1134.48 1062.48,1134.48 1062.57,1134.57 1108.51,1134.57 ; 840.82,1150.06 1093.92,1150.06 ; 1093.92,1150.06 ccw(c1093.92,1157.41) 1101.27,1157.41 ; 1093.92,1150.06 ccw(c1093.92,1157.41) 1101.27,1157.41 ; 1093.92,1166.1 cw(c1093.92,1158.75) 1101.27,1158.75 ; 1093.92,1166.1 cw(c1093.92,1158.75) 1101.27,1158.75 ; 1101.27,1157.41 1101.27,1158.75 ; 1108.51,1134.57 ccw(c1108.51,1187.63) v1(1146.03,1150.11) cw(c1108.51,1187.63) 1108.51,1134.57
RESET#: U1.AC25 U13.T2 U30.T2 | length 2223.9
  Top w4.2: v1(348.06,1521.94) U13.T2@378.56,1521.94 ; v1(356.59,930.22) 356.59,908.53 ccw(c381.41,908.53) 363.86,890.97 U30.T2@378.56,876.27 ; 533.79,620.87 cw(c533.79,652.96) v1(511.09,630.26) ccw(c533.79,652.96) 533.79,620.87 ; 533.79,620.87 900.95,620.87 ; 900.95,620.87 ccw(c900.95,722.57) 972.87,650.65 ; 900.95,620.87 ccw(c900.95,722.57) 972.87,650.65 ; 972.87,650.65 1035.72,713.51 ; 1035.72,713.51 cw(c1064.15,685.07) 1064.15,725.28 ; 1035.72,713.51 cw(c1064.15,685.07) 1064.15,725.28 ; 1064.15,725.28 1079.41,725.28 ; 1079.41,725.28 ccw(c1079.41,770.31) 1111.25,738.47 ; 1079.41,725.28 ccw(c1079.41,770.31) 1111.25,738.47 ; 1111.25,738.47 1125.29,752.51 ; 1125.29,752.51 ccw(c1049.88,827.92) U1.AC25@1156.52,827.92 cw(c1049.88,827.92) 1125.29,752.51
  Bottom w4.2: v1(348.06,1521.94) ccw(c531.14,1338.86) 272.23,1338.86 272.23,1191.59 ccw(c331.56,1191.59) 289.6,1149.63 368.04,1071.2 cw(c335.89,1039.06) 381.35,1039.06 381.35,1024.94 cw(c321.73,1024.94) 363.89,982.79 358.49,977.39 ccw(c372.26,963.62) 352.79,963.62 352.79,939.38 ccw(c365.75,939.38) v1(356.59,930.22) 356.59,924.17 467,813.76 ; 467,813.76 cw(c414.87,761.63) 488.59,761.63 ; 467,813.76 cw(c414.87,761.63) 488.59,761.63 ; 488.59,738.46 ccw(c509.41,738.46) 494.69,723.74 ; 488.59,738.46 ccw(c509.41,738.46) 494.69,723.74 ; 488.59,738.46 488.59,761.63 ; 494.69,723.74 498.3,720.12 ; 498.3,720.12 cw(c482.97,704.79) 504.65,704.79 ; 498.3,720.12 cw(c482.97,704.79) 504.65,704.79 ; 504.65,645.81 ccw(c526.64,645.81) v1(511.09,630.26) cw(c526.64,645.81) 504.65,645.81 ; 504.65,645.81 504.65,704.79
RESET_KEY: KEY4.1 R11.2 R13.1 U2.2 | length 420
  Top w5: KEY4.1@39.37,202.36 39.37,119.53 85.89,73.01 85.89,-38.15 105.85,-58.12 U2.2@130.95,-58.12 ; U2.2@124.52,-61.43 121.01,-61.43 133.56,-58.12 U2.2@130.95,-58.12 ; v1(158.41,-36.81) 152.26,-36.81 U2.2@130.95,-58.12
  Bottom w5: R11.2@135.65,-36.81 v1(158.41,-36.81) R13.1@187.16,-36.81
SADDA_0: R196.2 U23.15 | length 128.7
  Bottom w5: U23.15@1479.43,1900.24 1511.51,1900.24 1540.87,1870.89 R196.2@1540.87,1815.81
SADDA_1: R121.2 U23.14 | length 160.8
  Bottom w5: U23.14@1479.43,1915.99 1513.54,1915.99 1577.63,1851.9 R121.2@1577.63,1815.81
SD1_CD: R78.2 U1.F24 | length 1574.3
  Top w5: U1.F24@1591.56,853.51 1604.37,840.71 1604.37,793.82 1684.58,713.61 2169.52,713.61 2296.19,840.28 2296.19,1561.22 R78.2@2303.87,1568.9
SD1_CLK: R80.2 U1.D25 | length 1557.9
  Top w5: U1.D25@1642.74,827.92 1642.74,809.23 1692.63,759.34 2148.06,759.34 2252.33,863.62 2252.33,1656.71 R80.2@2303.75,1708.13
SD1_CMD: R72.2 U1.D24 | length 1672.4
  Top w5: U1.D24@1642.74,853.51 1655.75,840.5 1655.75,812.93 1692.7,775.98 2142.5,775.98 2235.53,869.01 2235.53,1768.54 2295.73,1828.74 R72.2@2303.87,1828.74
SD1_DAT0: R71.2 U1.E24 | length 1579
  Top w5: U1.E24@1617.15,853.51 1629.8,840.86 1629.8,804.5 1691.81,742.49 2154.01,742.49 2269.22,857.7 2269.22,1620.67 R71.2@2303.87,1655.32
SD1_DAT1: R70.2 U1.E25 | length 1544
  Top w5: U1.E25@1617.15,827.92 1617.15,799.29 1687.09,729.35 2161.83,729.35 2282.55,850.07 2282.55,1590.89 R70.2@2303.87,1612.2
SD1_DAT2: R69.2 U1.C24 | length 1676.1
  Top w5: U1.C24@1668.34,853.51 1681.13,840.72 1681.13,820.83 1700.14,801.81 2122.1,801.81 2206.59,886.3 2206.59,1818.84 2303.11,1915.35 R69.2@2303.87,1915.35
SD1_DAT3: R68.2 U1.C25 | length 1641.1
  Top w5: U1.C25@1668.34,827.92 1668.33,817.06 1697.15,788.24 2131.34,788.24 2220.4,877.31 2220.4,1788.64 2303.81,1872.05 R68.2@2303.87,1872.05
SD2_CD: R104.2 U1.B25 | length 154.9
  Top w5: U1.B25@1693.93,827.92 1707.8,814.04 1829.3,814.04 1837.87,822.62 R104.2@1839.56,822.62
SD_CDN: CN1.9 R73.2 R78.1 | length 168.1
  Top w5: R78.1@2337.87,1568.9 CN1.9@2433.07,1568.9 v1(2482.31,1568.9)
  Bottom w5: v1(2482.31,1568.9) R73.2@2506,1568.9
SD_CLK: C116.2 CN1.5 R80.1 | length 129.3
  Top w5: R80.1@2303.75,1742.13 C116.2@2341.57,1742.13 CN1.5@2433.07,1742.13
SD_CMD: CN1.3 R72.1 R76.2 | length 168.1
  Top w5: R72.1@2337.87,1828.74 CN1.3@2433.07,1828.74 v1(2481.98,1828.74)
  Bottom w5: v1(2481.98,1828.74) R76.2@2506,1828.74
SD_DAT0: CN1.7 R71.1 R75.2 | length 172.2
  Top w5: R71.1@2337.87,1655.32 2338.06,1655.51 CN1.7@2433.07,1655.51 2474.21,1655.51 v1(2483.95,1645.77)
  Bottom w5: v1(2483.95,1645.77) R75.2@2506,1645.77
SD_DAT1: CN1.8 R70.1 R74.2 | length 170.2
  Top w5: R70.1@2337.87,1612.2 CN1.8@2433.07,1612.2 v1(2483.13,1612.2)
  Bottom w5: v1(2483.13,1612.2) 2501.08,1612.2 R74.2@2506,1607.29
SD_DAT2: CN1.1 R69.1 R77.2 | length 168.1
  Top w5: R69.1@2337.87,1915.35 CN1.1@2433.07,1915.35 2481.09,1915.35 v1(2481.14,1915.31)
  Bottom w5: v1(2481.14,1915.31) R77.2@2506,1915.31
SD_DAT3: CN1.2 R68.1 R79.2 | length 168.1
  Top w5: R68.1@2337.87,1872.05 CN1.2@2433.07,1872.05 v1(2481.98,1872.05)
  Bottom w5: v1(2481.98,1872.05) R79.2@2506,1872.05
SENSOR0_MIPI_CLKM: U1.U2 U23.32 | length 477.4
  Top w4.2: U1.U2@1310.07,1416.51 1322.9,1429.34 1322.9,1644.86 v1(1326.86,1648.82)
  Bottom w4.2: U23.32@1282.58,1837.26 1267.93,1837.26 1255.05,1824.37 1255.05,1720.63 v1(1326.86,1648.82)
SENSOR0_MIPI_CLKP: U1.U1 U23.31 | length 430.4
  Top w4.2: U1.U1@1310.07,1442.1 1312.7,1444.73 1312.7,1656.74 v1(1326.92,1670.96)
  Bottom w4.2: U23.31@1282.58,1821.51 1270.99,1821.51 1265.54,1816.05 1265.54,1725.13 1265.26,1724.86 1319.16,1670.96 v1(1326.92,1670.96)
SENSOR0_MIPI_DM0: U1.W2 U23.30 | length 409.4
  Top w4.2: U1.W2@1258.89,1416.51 1245.99,1429.41 1245.99,1693.89 1286.07,1733.97 v1(1286.07,1741.76)
  Bottom w4.2: v1(1286.07,1741.76) 1310.14,1765.83 U23.30@1310.14,1793.95
SENSOR0_MIPI_DM1: U1.V1 U23.27 | length 388.3
  Top w4.2: U1.V1@1284.48,1442.1 1286.67,1444.29 1286.67,1678.5 1337.28,1729.09 v1(1337.28,1739.93)
  Bottom w4.2: v1(1337.28,1739.93) 1340.03,1739.93 1362.93,1762.82 1362.93,1772.87 1357.38,1778.42 U23.27@1357.38,1793.95
SENSOR0_MIPI_DM2: U1.T1 U23.24 | length 385
  Top w4.2: U1.T1@1335.66,1442.1 1337.86,1444.3 1337.86,1627.98 1404.62,1694.74 1404.62,1703.37 v1(1404.62,1733.42)
  Bottom w4.2: v1(1404.62,1733.42) 1410.17,1738.97 1410.17,1772.17 1404.62,1777.72 U23.24@1404.62,1793.95
SENSOR0_MIPI_DM3: U1.R1 U23.22 | length 387.5
  Top w4.2: U1.R1@1361.25,1442.1 1363.9,1444.75 1363.9,1609.8 1436.12,1682.03 v1(1436.12,1747.45)
  Bottom w4.2: v1(1436.12,1747.45) 1441.67,1753 1441.67,1775.76 1436.12,1781.31 U23.22@1436.12,1793.95
SENSOR0_MIPI_DP0: U1.W1 U23.29 | length 381.8
  Top w4.2: U1.W1@1258.89,1442.1 1256.19,1444.79 1256.19,1689.66 v1(1306.89,1740.36)
  Bottom w4.2: v1(1306.89,1740.36) 1306.89,1748.15 1325.88,1767.14 U23.29@1325.88,1793.95
SENSOR0_MIPI_DP1: U1.V2 U23.26 | length 414.2
  Top w4.2: U1.V2@1284.48,1416.51 1296.87,1428.9 1296.87,1674.28 v1(1356.56,1733.97)
  Bottom w4.2: v1(1356.56,1733.97) 1356.56,1742.02 1373.13,1758.59 U23.26@1373.13,1793.95
SENSOR0_MIPI_DP2: U1.T2 U23.23 | length 412.5
  Top w4.2: U1.T2@1335.66,1416.51 1348.07,1428.91 1348.07,1623.75 1414.83,1690.52 1414.83,1710.96 v1(1420.37,1716.5)
  Bottom w4.2: v1(1420.37,1716.5) U23.23@1420.37,1793.95
SENSOR0_MIPI_DP3: U1.R2 U23.21 | length 415
  Top w4.2: U1.R2@1361.25,1416.51 1374.11,1429.37 1374.11,1605.58 1446.33,1677.8 1446.33,1724.99 v1(1451.87,1730.53)
  Bottom w4.2: v1(1451.87,1730.53) U23.21@1451.87,1793.95
SENSOR_D0: RN6.1 U1.P4 | length 881.1
  Top w5: U1.P4@1386.84,1365.33 v1(1399.63,1378.12) ; RN6.1@1823.28,1970.98 1823.28,1795.51 v1(1824.33,1794.46)
  L4 SIG w5: v1(1399.63,1378.12) 1405.88,1384.37 1405.88,1536.07 1537.45,1667.64 1697.51,1667.64 v1(1824.33,1794.46)
SENSOR_D1: RN6.2 U1.P3 | length 911.9
  Top w5: v1(1374.04,1378.12) U1.P3@1386.84,1390.92 ; v1(1844.94,1815.99) RN6.2@1844.93,1970.98
  L4 SIG w5: v1(1374.04,1378.12) 1390.23,1394.31 1390.23,1541.29 1530.5,1681.57 1689.49,1681.57 1824.41,1816.48 1844.45,1816.48 v1(1844.94,1815.99)
SENSOR_D2: RN6.3 U1.P2 | length 903.4
  Top w5: v1(1374.04,1403.71) U1.P2@1386.84,1416.51 ; v1(1864.48,1840.34) 1864.48,1970.84 RN6.3@1864.62,1970.98
  L4 SIG w5: v1(1374.04,1403.71) 1374.04,1545.4 1526.97,1698.33 1686.67,1698.33 1829.06,1840.72 1864.09,1840.72 v1(1864.48,1840.34)
SENSOR_D3: RN6.4 U1.P1 | length 874.5
  Top w5: U1.P1@1386.84,1442.1 1386.84,1565.39 1506.16,1684.71 1742.95,1684.71 1886.27,1828.04 RN6.4@1886.27,1970.98
SENSOR_D4: RN4.1 U1.N3 | length 944.6
  Top w5: U1.N3@1412.43,1390.92 1399.83,1403.51 1399.83,1557.79 1511.67,1669.63 1750.43,1669.63 1929.6,1848.81 RN4.1@1929.6,1970.98
SENSOR_D5: RN4.2 U1.N1 | length 893.7
  Top w5: U1.N1@1412.43,1442.1 1412.43,1550.03 1516.62,1654.23 1758.41,1654.23 1951.26,1847.07 RN4.2@1951.26,1970.98
SENSOR_D6: RN4.3 U1.N2 | length 929
  Top w5: U1.N2@1412.43,1416.51 1425.17,1429.25 1425.17,1542.88 1521.4,1639.1 1765.85,1639.1 1970.94,1844.19 RN4.3@1970.94,1970.98
SENSOR_D7: RN4.4 U1.M1 | length 904.5
  Top w5: U1.M1@1438.02,1442.1 1438.02,1535.65 1526.11,1623.74 1775.11,1623.74 1992.6,1841.23 RN4.4@1992.6,1970.98
SENSOR_D8: RN5.1 U1.M2 | length 948.4
  Top w5: U1.M2@1438.02,1416.51 1451.59,1430.08 1451.59,1530 1529.97,1608.39 1780.27,1608.39 2034.41,1862.52 2034.41,1970.29 RN5.1@2035.1,1970.98
SENSOR_D9: RN5.2 U1.L1 | length 921.9
  Top w5: U1.L1@1463.61,1442.1 1463.61,1521.95 1535.59,1593.93 1787.15,1593.93 2056.75,1863.54 RN5.2@2056.75,1970.98
SENSOR_D10: RN5.3 U1.L2 | length 956.9
  Top w5: U1.L2@1463.61,1416.51 1476.43,1429.32 1476.43,1515.04 1541.19,1579.81 1794.77,1579.81 2076.44,1861.48 RN5.3@2076.44,1970.98
SENSOR_D11: RN5.4 U1.K1 | length 929.1
  Top w5: U1.K1@1489.2,1442.1 1489.2,1509.23 1545.36,1565.4 1798,1565.4 2098.09,1865.49 RN5.4@2098.09,1970.98
SENSOR_HSYNC: FPC1.14 U1.R3 | length 1263.3
  Top w5: v1(1348.45,1378.12) U1.R3@1361.25,1390.92 ; v1(2116.14,2092.86) FPC1.14@2116.14,2165.35
  L4 SIG w5: v1(1348.45,1378.12) 1331.66,1394.91 1331.66,1415.17 1356.38,1439.9 1356.38,1548.36 1523.26,1715.23 1683.49,1715.23 2061.12,2092.86 v1(2116.14,2092.86)
SENSOR_MCLK: R24.1 U1.J1 | length 908.7
  Top w5: U1.J1@1514.79,1442.1 1514.79,1487.63 1558.66,1531.5 1800.62,1531.5 2155.51,1886.39 R24.1@2155.51,1943.64
SENSOR_PWREN: R35.2 U1.L4 | length 1158.3
  Top w5: U1.L4@1463.61,1365.33 v1(1476.4,1378.12) ; v1(2253.94,1977.46) R35.2@2253.94,2018.64
  L4 SIG w5: v1(1476.4,1378.12) 1493.43,1395.14 1493.43,1519.28 1559.13,1584.99 1729.07,1584.99 2122.1,1978.02 2253.37,1978.02 v1(2253.94,1977.46)
SENSOR_RESET: R36.2 U1.L3 | length 1171
  Top w5: U1.L3@1463.61,1390.92 v1(1476.4,1403.71) ; v1(2290.91,1995.13) R36.2@2290.91,2018.64
  L4 SIG w5: v1(1476.4,1403.71) 1476.4,1523.1 1555.19,1601.9 1722.36,1601.9 2115.41,1994.95 2290.72,1994.95 v1(2290.91,1995.13)
SENSOR_SCL: FPC1.5 R6.1 U1.M3 | length 1349.1
  Top w5: U1.M3@1438.02,1390.92 v1(1450.81,1403.71) ; v1(2293.31,2102.04) FPC1.5@2293.31,2165.35
  L4 SIG w5: v1(1450.81,1403.71) 1450.81,1518.39 1550.6,1618.18 1716.23,1618.18 2200.49,2102.43 2292.92,2102.43 v1(2293.31,2102.04)
  Bottom w5: R6.1@2264.08,2158.38 2264.08,2131.27 v1(2293.31,2102.04)
SENSOR_SDA: FPC1.4 R7.1 U1.M4 | length 1380.3
  Top w5: U1.M4@1438.02,1365.33 v1(1450.81,1378.12) ; v1(2312.99,2122.79) FPC1.4@2312.99,2165.35
  L4 SIG w5: v1(1450.81,1378.12) 1434.12,1394.81 1434.12,1523.08 1545.49,1634.46 1710.75,1634.46 2199.19,2122.9 2312.88,2122.9 v1(2312.99,2122.79)
  Bottom w5: R7.1@2301.39,2158.38 2301.39,2134.4 v1(2312.99,2122.79)
SENSOR_SPCLK: R31.2 U1.J2 | length 1027.1
  Top w5: U1.J2@1514.79,1416.51 1527.63,1429.35 1527.63,1453.77 1571.26,1497.4 1802.21,1497.4 2214.07,1909.26 R31.2@2214.07,2018.64
SENSOR_VSYNC: FPC1.13 U1.R4 | length 1254.5
  Top w5: U1.R4@1361.25,1365.33 v1(1374.04,1352.53) ; v1(2135.83,2083.81) 2135.83,2120.77 FPC1.13@2135.83,2165.35
  L4 SIG w5: v1(1374.04,1352.53) 1384,1362.49 1405.69,1362.49 1420.61,1377.41 1420.61,1530.19 1541.16,1650.74 1703.82,1650.74 2135.83,2082.75 v1(2135.83,2083.81)
SFL_CLK: U1.A19 U12.6 | length 282.8
  Top w5: U1.A19@1719.52,981.47 1734.79,981.47 1770.9,945.36 v1(1770.9,920.13)
  Bottom w5: U12.6@1728.14,746.58 1728.14,817.62 1770.9,860.38 v1(1770.9,920.13)
SFL_CS: R82.2 U1.A18 U12.1 | length 785.5
  Top w5: U1.A18@1719.52,1007.06 1754,1007.06 1805.17,955.88 v1(1805.17,938.37) 1805.17,897.5 R82.2@1839.56,863.11
  Bottom w5: v1(1805.17,938.37) 1832.87,938.37 1876.87,894.37 1876.87,503.59 1831.59,458.31 U12.1@1828.14,431.62
SFL_HOLD: R83.2 U1.B18 U12.7 | length 401.3
  Top w5: U1.B18@1693.93,1007.06 1706.33,994.65 1741.61,994.65 1787.32,948.94 v1(1787.32,903.75) ; v1(1778.01,696.79) R83.2@1778.14,668.93
  Bottom w5: v1(1778.01,696.79) U12.7@1778.14,746.58 1778.14,845.45 1787.32,854.63 v1(1787.32,903.75)
SFL_MISO: U1.B17 U12.2 | length 786.2
  Top w5: U1.B17@1693.93,1032.65 1706.78,1045.51 1759.99,1045.51 1847.07,958.43 v1(1847.07,894.19)
  Bottom w5: U12.2@1778.14,431.62 1778.14,460.67 1797.48,480.01 1836.17,480.01 1863.54,507.38 1863.54,877.72 v1(1847.07,894.19)
SFL_MOSI: U1.B19 U12.5 | length 304.4
  Top w5: U1.B19@1693.93,981.47 1706.65,968.73 1728.49,968.73 1754.48,942.75 v1(1754.48,937.15)
  Bottom w5: U12.5@1678.14,746.58 1678.14,791.22 1754.48,867.61 v1(1754.48,937.15)
SFL_WP: R84.2 U1.A17 U12.3 | length 894.7
  Top w5: U1.A17@1719.52,1032.65 1753.5,1032.65 1823.55,962.59 v1(1823.55,918.87)
  Bottom w5: R84.2@1728.14,304.02 U12.3@1728.14,431.62 1728.14,463.85 1757.41,493.12 1826.46,493.12 1851.5,518.15 1851.5,863.33 1823.55,891.27 v1(1823.55,918.87)
SPK+: J3.1 R65.2 TP5.1 U9.5 | length 833.2
  Top w8: v1(572.66,1835.59) TP5.1@606.81,1835.59 643.45,1835.59 ; 643.49,1835.56 738.66,1835.56 J3.1@716.31,1835.59
  Bottom w8: R65.2@232.48,2103.02 287.12,2103.02 ; U9.5@287.12,2184.44 287.12,2103.02 ; v1(572.66,1835.59) 451.34,1835.59 407.83,1879.11 407.83,2071.16 375.97,2103.02 287.12,2103.02
SPK-: J3.2 TP4.1 U9.8 | length 606.5
  Top w8: v1(612,1884.8) TP4.1@645.73,1884.8 J3.2@716.31,1884.8
  Bottom w8: U9.8@363.89,2184.44 363.89,2172.83 404.06,2172.83 444.86,2132.03 444.86,1921.78 481.84,1884.8 v1(612,1884.8)
SYSTEM_PWREN: D4.2 D5.3 D10.2 D11.2 R137.1 R142.1 R144.1 R179.1 R180.1 | length 6618.5
  Top w5: v1(2566.95,2336.31) 2573.23,2342.58 R144.1@2599.37,2342.58 2600.52,2341.44 2600.52,2302.74 D11.2@2619.06,2284.21
  L4 SIG w5: v1(987.73,348.18) 968.2,328.65 689.7,328.65 572.09,211.05 434.08,211.05 234.09,11.06 84.23,11.06 15.11,80.18 15.11,1711.28 3.72,1722.68 3.72,1801.29 18.81,1816.39 18.81,2196.98 105.65,2283.82 865.06,2283.82 v1(884.99,2263.89) 969.95,2263.89 1114.15,2263.89 v1(1185.86,2335.61) 1499.18,2335.61 v1(1499.88,2336.31) v1@1816.53,2336.31 ; v1(1817.23,2337) v1@1816.53,2336.31 ; v1(2566.95,2336.31) 2499.19,2336.31 1817.23,2336.31 v1@1816.53,2336.31
  Bottom w5: D5.3@634,382.34 634,334.62 653.04,315.59 955.14,315.59 v1(987.73,348.18) D4.2@1020.89,372.12 D10.2@1020.88,456.37 ; v1(884.99,2263.89) R137.1@884.99,2283.46 ; v1(1185.86,2335.61) 1187.72,2333.74 R180.1@1187.72,2317.46 ; v1(1499.88,2336.31) 1499.96,2336.22 R142.1@1499.96,2317.46 ; v1(1817.23,2337) 1817.4,2336.83 R179.1@1817.4,2317.46
UART_RXD: R3.1 R103.2 U1.Y3 | length 1172.3
  Top w4.2: v1(1220.5,1403.71) U1.Y3@1233.3,1390.92
  Top w5: v1(926.87,1705.86) 926.87,1952.22 1071.02,2097.38 1267.79,2097.38 R3.1@1287.93,2117.52 R103.2@1342.18,2117.52
  Bottom w5: v1(926.87,1705.86) 926.87,1701.2 1220.5,1407.57 v1(1220.5,1403.71)
UART_TXD: R15.1 U1.Y4 | length 1126.5
  Top w4.2: v1(1220.5,1378.12) U1.Y4@1233.3,1365.33
  Top w5: v1(905.49,1713.05) 909.85,1717.41 909.85,1959.72 1067.65,2117.52 R15.1@1239,2117.52
  Bottom w5: v1(905.49,1713.05) 905.49,1705.57 1203.74,1407.32 1203.74,1394.87 v1(1220.5,1378.12)
USB_5V: C78.2 C176.2 D6.1 D7.1 D13.2 D14.1 Q9.2 R122.1 R151.2 R155.2 R161.1 R168.2 R190.1 R191.1 U6.4 U22.4 | length 2196.7
  Top w10: v2(1507.42,431.75) 1526,413.16 v2(2004.77,413.16)
  Bottom w5: D7.1@2004.36,480.86 v2(2004.77,413.16) D6.1@2004.36,399.86 2004.77,301.88 2015.56,291.09 2015.56,207.49 R122.1@2014.74,206.67 ; U6.4@2035.71,203.5 U6.4@2035.92,203.28 ; C78.2@2126.34,216.43 2131.8,216.43 C78.2@2145.61,230.23 ; C78.2@2126.34,230.23 C78.2@2145.61,230.23 ; U22.4@2218.14,209.86 2218.14,208.75 2212.2,208.75 2193.24,227.7 C176.2@2191.11,229.39 2190.27,230.23 C78.2@2145.61,230.23
  Bottom w10: R161.1@923.6,466.03 958.22,500.66 1048.88,500.66 1062.83,486.7 1062.83,424.86 ; D13.2@1020.89,287.91 1062.83,329.85 1062.83,403.98 ; Q9.2@1315.74,473.33 1228.5,473.33 1168.51,413.34 1074.23,413.34 ; Q9.2@1316.22,473.33 R191.1@1473.42,473.33 1473.42,465.75 v2(1507.42,431.75) R190.1@1507.42,398.33 ; U22.4@2218.14,203.44 U22.4@2218.14,208.75 ; U22.4@2218.14,209.86 2218.14,238.38 2231.22,251.45 R155.2@2231.22,261.7 ; 1062.83,403.98 1064.87,403.98 1074.23,413.34 ; 1062.83,403.98 1062.83,424.86 ; 1062.83,424.86 1074.23,413.47 1074.23,413.34
  Bottom w15: U22.4@2218.14,203.44 2218.14,193.16 2218.14,179.03 2234.9,162.27 2338.64,162.27 R151.2@2338.74,162.27 ; R168.2@2338.64,131.53 R151.2@2338.74,162.27 ; R151.2@2338.64,168.51 R151.2@2338.74,162.27
  Bottom w20: Q9.2@1315.74,473.33 Q9.2@1316.22,473.33
  Bottom w25: R122.1@2014.74,206.67 2015.46,206.67 2018.62,203.5 2035.71,203.5 2051.23,203.5 2052.24,203.5 C78.2@2126.34,216.43
USB_DET: C181.2 R161.2 R162.2 R164.2 R165.1 | length 181
  Bottom w5: R162.2@889.6,420.89 R161.2@889.6,466.03 C181.2@840.4,466.03 R165.1@840.46,503.54 R164.2@889.6,503.54
USB_DETA: R162.1 U1.Y25 | length 566.5
  Top w5: v1(943.44,413.03) 943.44,450.18 1243.12,749.88 1243.12,804.73 1233.29,814.57 U1.Y25@1233.3,827.92
  Bottom w4.4: R162.1@923.6,420.89 929.59,414.9 942.37,414.9 v1(943.44,413.03)
USB_DM: R106.2 U1.G25 | length 4272.7
  Top w4.4: v1(567.17,2032.71) 573.66,2039.2 623.84,2039.2 R106.2@640.71,2022.33 ; v1(1560.98,770.12) 1560.98,770.94 1569.13,779.1 1569.13,827.92 U1.G25@1565.97,827.92
  L4 SIG w4.4: v1(567.17,2032.71) 404.28,2195.6 161.21,2195.6 100.21,2134.61 100.21,354.34 161.44,293.11 534.16,293.11 699.8,458.75 1422.78,458.75 1560.98,596.95 v1(1560.98,770.12)
USB_DP: R107.2 U1.G24 | length 4345.2
  Top w4.4: v1(568.24,2053.82) 573.05,2049.01 628.82,2049.01 R107.2@640.71,2060.9 ; U1.G24@1565.97,853.51 1578.93,840.55 1578.93,773.56 v1(1581.88,770.61)
  L4 SIG w4.4: v1(568.24,2053.82) 559.93,2053.82 408.35,2205.41 157.14,2205.41 89.81,2138.08 89.81,350.03 156.54,283.3 538.7,283.3 703.75,448.35 1426.24,448.35 1570.79,592.9 1570.79,754.95 1581.88,766.05 v1(1581.88,770.61)
USB_OTG_ID: R109.2 R118.2 R157.1 U1.D17 | length 5211.2
  Top w5: U1.D17@1642.74,1032.65 v1(1655.54,1045.44)
  L4 SIG w5: v1(529.91,2255.13) 515.96,2269.09 111.05,2269.09 37.11,2195.15 37.11,91.18 95.83,32.47 220.74,32.47 421.32,233.05 562.98,233.05 680.58,350.65 952.9,350.65 1018.93,416.67 1434.99,416.67 1605.38,587.23 v1(1652.6,587.23)
  Bottom w5: R109.2@529.91,2110.17 R118.2@529.91,2148.03 R157.1@529.91,2186.53 v1(529.91,2255.13) ; v1(1652.6,587.23) 1648.53,591.3 1648.53,781.24 1737.84,870.54 1737.84,987.55 1701.98,1023.4 1677.58,1023.4 v1(1655.54,1045.44)
USB_PWR: C77.2 J8.1 R122.2 U6.3 | length 573.2
  Top w5: v2(1956.64,330.6) 1964.68,322.57 J8.1@1964.68,120.08
  Bottom w5: v2@1902.4,250.63 v2(1902.4,247.77) 1902.4,210.98 1925.86,210.98 U6.3@1933.56,203.28 1951.36,203.28 1952.16,204.09 R122.2@1954.74,206.67 ; v2(1931.31,331.9) 1944.63,331.9 1952.16,331.08 v2(1956.64,330.6)
  Bottom w15: v2(1869.59,248.42) 1869.91,248.74 v2@1869.91,288.37 ; v2(1869.59,288.05) v2@1869.91,288.37 ; v2@1902.4,250.63 C77.2@1902.4,287.34 ; C77.2@1912.94,287.72 C77.2@1902.4,287.34 ; v2(1931.31,331.9) 1930.33,330.92 v2@1902.4,330.92 ; v2@1869.91,288.37 v2(1869.91,330.92) 1874.89,330.92 v2@1901.75,330.92 ; v2@1901.75,330.92 v2@1902.4,330.92 ; v2@1901.75,330.92 v2(1902.4,331.57) v2@1902.4,330.92 ; C77.2@1902.4,287.34 v2@1902.4,330.92
USB_PWREN: D4.1 Q9.3 | length 288.2
  Bottom w5: D4.1@1140.89,372.12 1160.73,372.12 1224.43,435.83 Q9.3@1402.74,435.83
USBCAM_DM: J6.2 R106.1 | length 345.5
  Top w4.4: R106.1@674.71,2022.33 692.38,2040 857.97,2040 908.32,2090.35 941.18,2090.35 949.44,2098.61 J6.2@949.44,2137.8
USBCAM_DP: J6.3 R107.1 | length 291
  Top w4.4: R107.1@674.71,2060.9 685.81,2049.8 853.9,2049.8 900.22,2096.13 J6.3@900.22,2137.8
V_CONTORL: R164.1 U1.AB24 | length 457.1
  Top w5: v1(996.85,586.7) 1169.11,758.96 1169.11,840.52 U1.AB24@1182.11,853.51
  Bottom w5: R164.1@923.6,503.54 923.6,513.44 v1(996.85,586.7)
VBAT: C177.2 D8.1 D9.2 J7.1 Q8.3 R129.2 R138.2 R159.1 U22.3 | length 1593.3
  Top w4.2: D8.1@2435.18,-33.42 D9.2@2435.18,47.94 2435.18,120.74 J7.1@2493.51,179.06
  Top w5: v2(2262.72,464.28) 2262.72,214.32 2293.96,183.08 2494.51,183.08 2493.51,182.08 J7.1@2493.51,179.06
  Bottom w4.2: J7.1@2493.51,179.06 2495.13,177.45 C177.2@2495.13,72.56 R138.2@2495.13,9.67 R129.2@2495.13,-54.26
  Bottom w5: v2(2199.17,489.74) v2(2199.17,464.28) ; Q8.3@2233.78,464.28 2233.78,444.59 2229.9,440.72 v2(2199.17,440.72) v2(2199.17,464.28) ; v2(2262.95,440.74) 2262.95,463.21 v2(2262.72,464.28) ; v2(2263.86,489.74) 2263.86,465.42 v2(2262.72,464.28) ; v2(2199.17,464.28) Q8.3@2231.43,464.28 v2(2262.72,464.28)
  Bottom w8: Q8.3@2231.43,464.28 2233.78,464.28 2234.61,464.28 2251.23,480.9 R159.1@2251.23,525.64 ; J7.1@2493.51,179.06 J7.1@2493.7,179.26
  Bottom w40: U22.3@2218.14,97.14 2218.14,61.84 2257.23,22.75 2450.08,22.75 2482.05,22.75 2492.91,11.88 R138.2@2495.13,9.67